# Altium PCB Acoustic_Cam.PcbDoc
Units mil, origin at the board's own origin, x right, y up, seen from the top; angles counter-clockwise.
Board outline 4410 x 4970 mil, 2 copper layers (Top Layer, Bottom Layer); 21 components, 26 nets, 120 pads, 43 vias.
Unrouted connection lines stored in the file: 5.
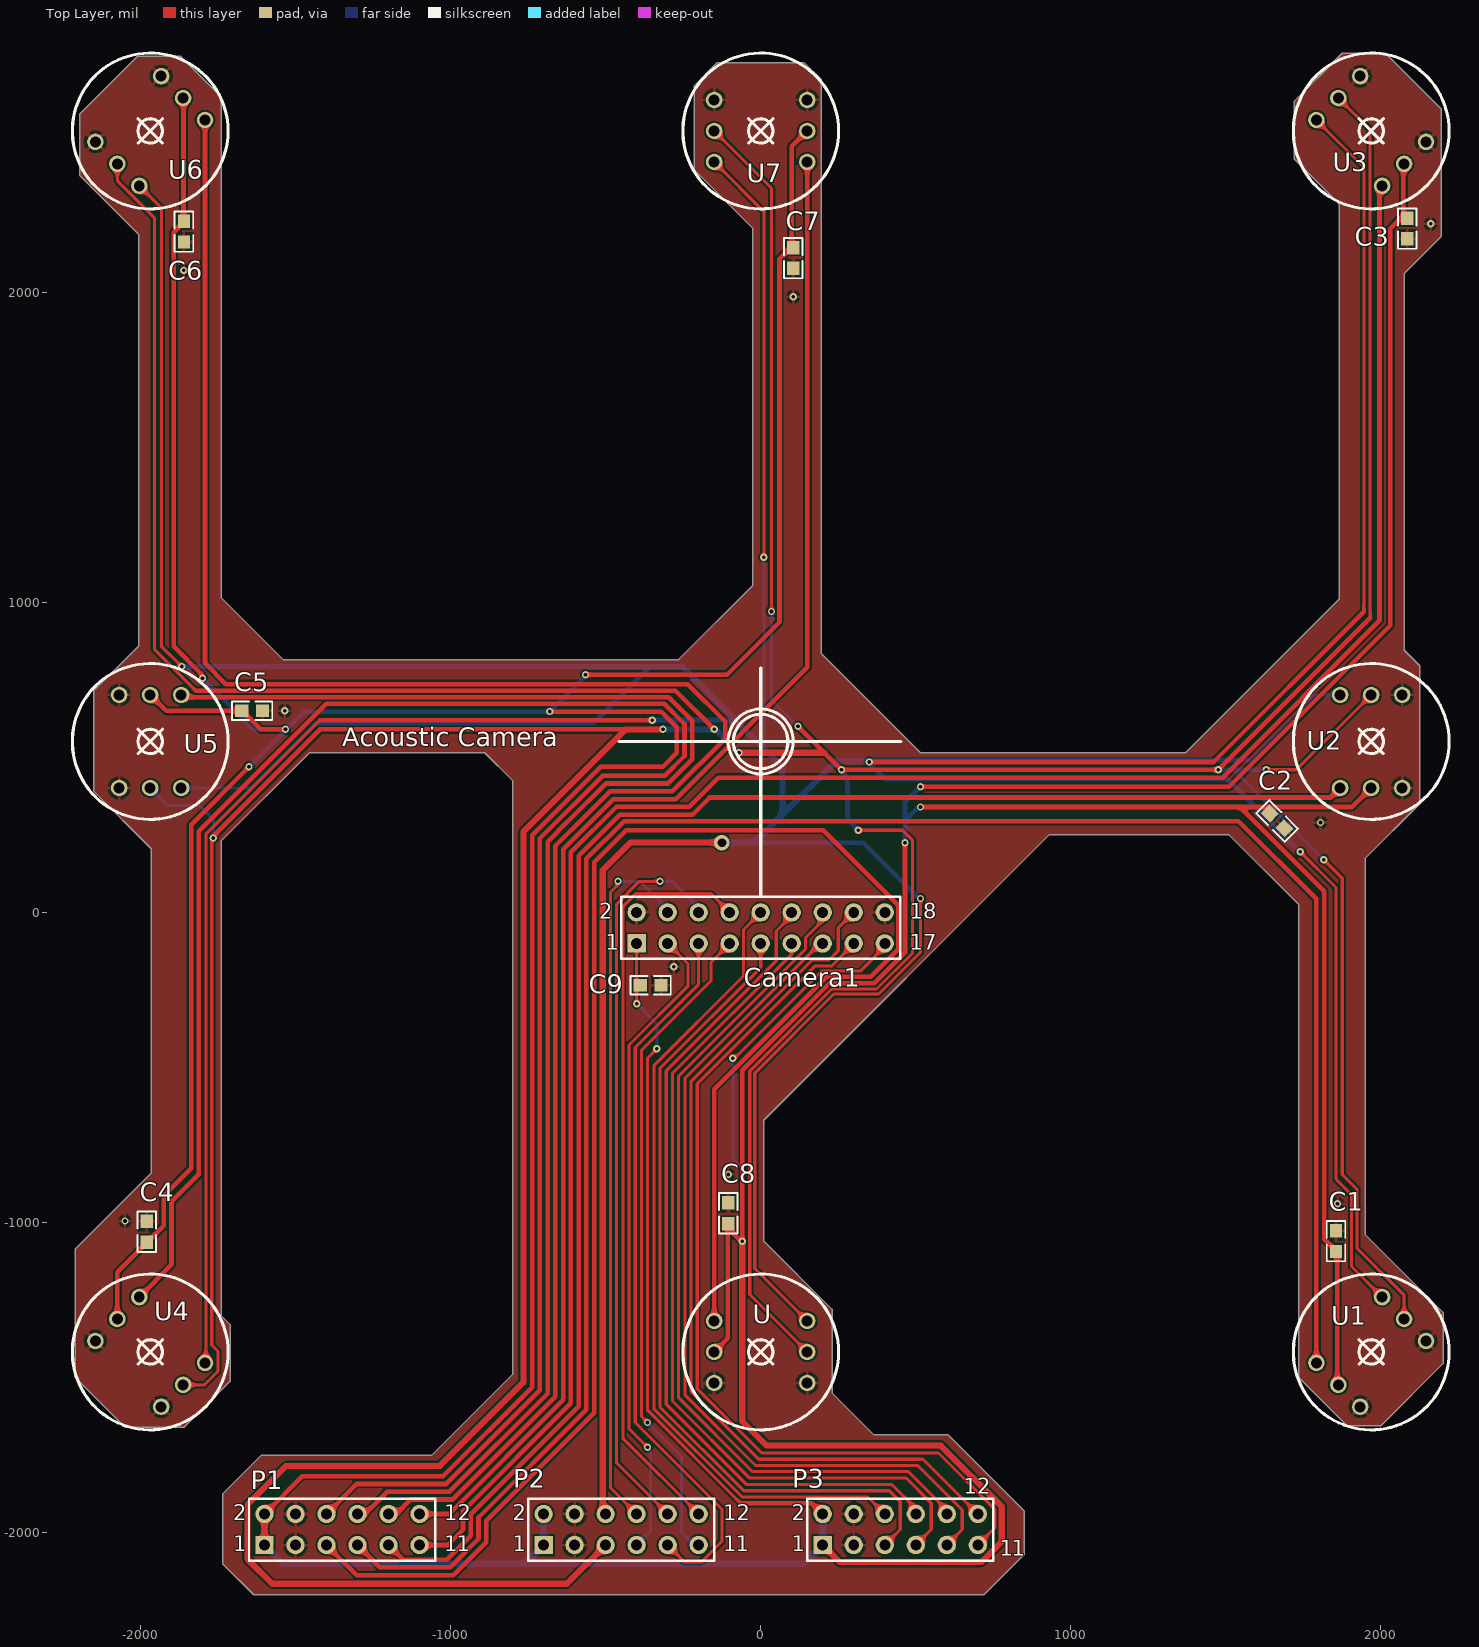
[diagram p0: Top Layer view]
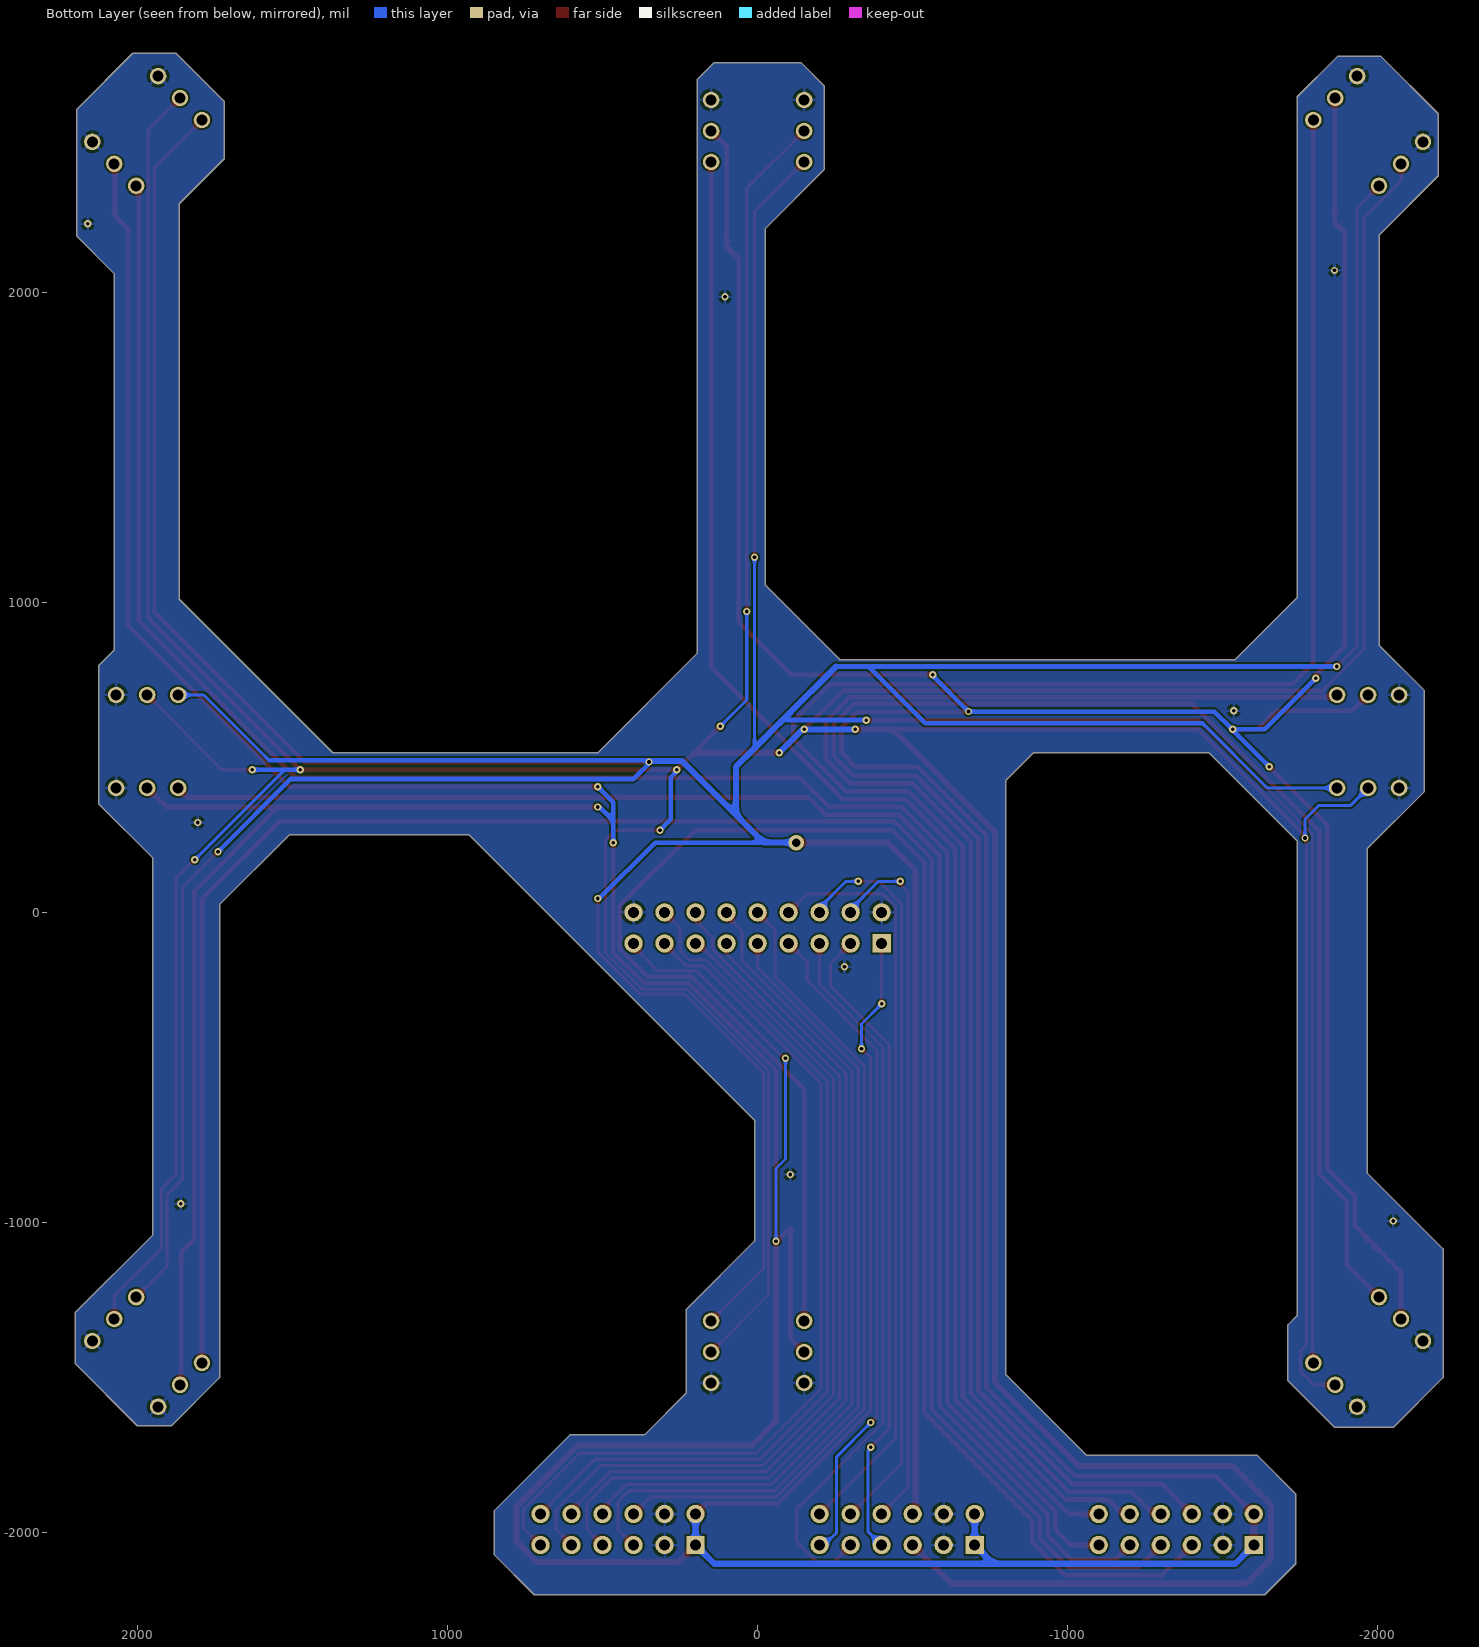
[diagram p1: Bottom Layer view, seen from below]

## Layer stack, top to bottom
Top Solder: solder mask 0.4, Solder Resist, Dk 3.5
Top Layer: signal copper 1.4
Dielectric 1: dielectric 12.6, FR-4, Dk 4.8
Bottom Layer: signal copper 1.4
Bottom Solder: solder mask 0.4, Solder Resist, Dk 3.5

## Board outline
-2050,-1660 -2210,-1500 -2210,-1085 -1965,-840 -1965,205 -2150,390 -2150,715 -2005,860 -2005,2185 -2195,2375 -2195,2575 -2010,2760 -1870,2760 -1740,2630 -1740,1015 -1540,815 -265,815 -25,1055 -25,2205 -215,2395 -215,2665 -140,2740 140,2740 195,2685 195,835 515,515 1370,515 1865,1010 1865,2285 1720,2430 1720,2615 1875,2770 2015,2770 2195,2590 2195,2180 2075,2060 2075,845 2125,795 2125,350 1950,175 1950,-1040 2200,-1290 2200,-1455 2000,-1655 1890,-1655 1735,-1500 1735,25 1510,250 930,250 10,-670 10,-1060 230,-1280 230,-1550 365,-1685 605,-1685 850,-1930 850,-2070 720,-2200 -1635,-2200 -1735,-2100 -1735,-1875 -1610,-1750 -1060,-1750 -800,-1490 -800,425 -890,515 -1455,515 -1740,230 -1740,-1300 -1710,-1330 -1710,-1510 -1860,-1660

## Design rules (kind name [scope] priority, off if disabled: settings)
Clearance [All] p1: gap=6 ignorepadtopadclearanceinfootprint=FALSE
PolygonConnect [All] p1: connectstyle=Relief reliefconductorwidth=10 reliefentries=4 polygonreliefangle="90 Angle" airgapwidth=10
RoutingVias [All] p1: holewidth=28 width=50 viastyle="Through Hole" minholewidth=11.81 minwidth=23.62 maxholewidth=28 maxwidth=50
SilkToSilkClearance [All] p1: silktosilkclearance=6
SilkToSolderMaskClearance [IsPad] p1: minsilkscreentomaskgap=6 clearancetoexposedcopper=TRUE
SolderMaskExpansion [All] p1: expansion=4
Width [All] p1: maxlimit=50 minlimit=6 preferedwidth=10
28 further rules are at their usual default settings.

## Classes and differential pairs
component class Sheet1: C1 C2 C3 C4 C5 C6 C7 C8 C9 Camera1 P1 P2 P3 U U1 U2 U4 U6 U7

## Components (designator, comment, footprint, x,y, rotation, side; value= is the part's Value field where it differs from the comment)
C1 "0.1uF" 0603-1 1855,-1060 r90 top
C2 "0.1uF" 0603-1 1665,295 r315 top
C3 "0.1uF" 0603-1 2085,2205 r270 top
C4 "0.1uF" 0603-1 -1980,-1030 r90 top
C5 "0.1uF" 0603-1 -1640,650 r0 top
C6 "0.1uF" 0603-1 -1860,2195 r270 top
C7 "0.1uF" 0603-1 105,2110 r270 top
C8 "0.1uF" 0603-1 -105,-970 r90 top
C9 "0.1uF" 0603-1 -355,-235 r0 top
Camera1 "OV7670" HDR2X9 -400,-100 r0 top
P1 "JE" HDR2X6 -1600,-2040 r0 top
P2 "JD" HDR2X6 -700,-2040 r0 top
P3 "JC" HDR2X6 200,-2040 r0 top
U "INMP441" INMP441board 0,-1417.32 r270 top
U1 "INMP441" INMP441board 1968.5,-1417.32 r315 top
U2 "INMP441" INMP441board 1968.5,551.18 r0 top
U3 "INMP441" INMP441board 1968.5,2519.68 r45 top
U4 "INMP441" INMP441board -1968.5,-1417.32 r225 top
U5 "INMP441" INMP441board -1968.5,551.18 r180 top
U6 "INMP441" INMP441board -1968.5,2519.68 r135 top
U7 "INMP441" INMP441board 0,2519.68 r90 top

## Footprints (in the part's own frame and the unit in brackets; to place one, negate y for a bottom-side part, rotate by r counter-clockwise, add the part's x,y. Pads: shape width x height; smd on the part's side, far side on the other; paste and mask are expansions set on the pad)
0603-1 [mm] "0603带丝印"
  rect 1.1x1 smd: 1(-0.85,0) 2(0.85,0)
  silkscreen extent -1.65,-0.76 1.65,0.76, body extent -0.8,-0.4 0.8,0.4, height 0.3
HDR2X6 [mm] "Connector; Header; 6x2 Position"
  rect 1.5x1.5 hole 0.9: 1(0,0)
  round 1.5 hole 0.9: 2(0,2.54) 3(2.54,0) 4(2.54,2.54) 5(5.08,0) 6(5.08,2.54) 7(7.62,0) 8(7.62,2.54) 9(10.16,0) 10(10.16,2.54) 11(12.7,0) 12(12.7,2.54)
  silkscreen extent -1.27,-1.27 13.97,3.81
HDR2X9 [mm] "Connector; Header; 9x2 Position"
  rect 1.5x1.5 hole 0.9: 1(0,0)
  round 1.5 hole 0.9: 2(0,2.54) 3(2.54,0) 4(2.54,2.54) 5(5.08,0) 6(5.08,2.54) 7(7.62,0) 8(7.62,2.54) 9(10.16,0) 10(10.16,2.54) 11(12.7,0) 12(12.7,2.54) 13(15.24,0) 14(15.24,2.54) 15(17.78,0) 16(17.78,2.54) 17(20.32,0) 18(20.32,2.54)
  silkscreen extent -1.27,-1.27 21.59,3.81
INMP441board [mm]
  round 1.35 hole 0.9: 1(-2.54,-3.81) 2(0,-3.81) 3(2.54,-3.81) 4(2.54,3.81) 5(0,3.81) 6(-2.54,3.81)
  silkscreen extent -6.38,-6.38 6.38,6.38

## Part data
C1 C2 C3 C4 C5 C6 C7 C8 C9: library part Cap, "Capacitor", LatestRevisionDate=17-Jul-2002, LatestRevisionNote="Re-released for DXP Platform.", PackageReference=RAD-0.3, Published=8-Jun-2000, Publisher="Altium Limited"
Camera1: library part "Header 9X2", "Header, 9-Pin, Dual row", LatestRevisionDate=17-Jul-2002, LatestRevisionNote="Re-released for DXP Platform.", Publisher="Altium Limited"
P1 P2 P3: library part "Header 6X2", "Header, 6-Pin, Dual row", LatestRevisionDate=17-Jul-2002, LatestRevisionNote="Re-released for DXP Platform.", Publisher="Altium Limited"

## Via types
v1: diameter 23.62, hole 11.81, Top Layer to Bottom Layer, 42 vias
v2: diameter 50, hole 28, Top Layer to Bottom Layer, 1 vias

## Nets (pads, with @x,y where several pads share a name; then routed paths per layer and width w, separated by ;. In a path a pad name is that pad's centre, name@x,y a point inside that pad or via, vN(x,y) a via of type N, cw(c..) or ccw(c..) an arc to the next point about the centre after c; other vN are vias at no path point)
+3.3: C1.1 C2.1 C3.1 C4.1 C5.1 C6.1 C7.1 C8.1 C9.1 Camera1.1 Camera1.17 P1.1 P1.2 P2.1 P2.2 P3.1 P3.2 U1.2 U2.2 U3.2 U4.2 U5.2 U6.2 U7.2 U.2 | length 29180
  Top Layer w10: v1(-400,-295) Camera1.1 ; v1(-335,-440) -364.53,-469.53 -364.53,-1605.47 -65,-1905 ; v1(-90,-470) -84.62,-470 196.1,-189.28 320.5,-189.28 400,-109.78 Camera1.17
  Top Layer w15: U4.2 -2074.57,-1160 -1925,-1010.43 -1925,-913.27 -1836.73,-825 -1836.73,283.27 v1(-1650,470) ; U5.2 -1917.32,650 C5.1 -1671.5,650 -1611.5,590 v1(-1532.5,590) ; U6.2 -1861.22,2624.53 -1861.22,2229.68 C6.1 -1860,2226.5 -1893.19,2193.31 -1893.19,858.19 -1800,765 v1(-1800,755) ; P1.2 -1477.97,-1817.97 -1024.39,-1817.97 -737.03,-1530.61 -737.03,207.26 -737.03,248.68 -515.71,470 -315,470 -270.69,514.31 -270.69,597.14 -321.05,647.5 v1(-680,647.5) ; v1(-565,766.25) -108.75,766.25 60.59,935.59 60.59,2107.08 95,2141.5 C7.1@95,2143.46 ; U.2 -105.93,-1373.25 -105.93,-1017.54 -63.46,-1060 v1(-59.23,-1060) -59.23,-509.71 221.7,-228.78 365.91,-228.78 465,-129.7 v1(465,225) ; -65,-1905 165,-1905 P3.2 ; C7.1@100,2143.46 100,2469.68 U7.2 ; v1(515,340) 1545,340 ; v1(515,405) 1510,405 2030,925 2030,2205 2072.28,2247.28 2072.28,2411.33 U3.2 ; C2.1@1635,340 1545,340 ; C2.1@1640,335 1645,340 1907.32,340 U2.2 ; U1.2 1858.72,-1519.67 1858.72,-1097.18 C1.1 1855,-1091.5 1829.19,-1065.69 1828.07,-1065.69 1816.73,-1054.35 1816.73,68.27 1545,340
  Top Layer w20: P1.1 P1.2 ; v1(-59.23,-1060) -59.23,-1640.77 19.09,-1719.09 580.91,-1719.09 777.5,-1915.68 777.5,-2029.01 711.51,-2095 255,-2095 P3.1
  Bottom Layer w10: v1(-400,-295) -335,-360 v1(-335,-440) ; v1(-90,-470) -90,-795 -59.23,-825.77 v1(-59.23,-1060)
  Bottom Layer w15: v1(-1800,755) -1635,590 v1(-1532.5,590) ; v1(-1650,470) -1532.5,587.5 v1(-1532.5,590) ; v1(-565,766.25) -565,762.5 v1(-680,647.5) -1472.5,647.5 -1530,590 v1(-1532.5,590) ; v1(465,225) 465,295 ; v1(515,340) 510,340 465,295 ; v1(515,405) 465,355 465,295
  Bottom Layer w20: P1.1 -1540,-2100 -860,-2100 -760,-2100 ; P2.2 P2.1 -760,-2100 ; P3.2 P3.1 140,-2100 -760,-2100
D0: Camera1.16 P3.12 | length 2882.2
  Top Layer w10: Camera1.16 250,-50 250,-123.28 220,-153.28 166.26,-153.28 -224.53,-544.07 -224.53,-1545.47 -6.64,-1763.36 523.36,-1763.36 P3.12
D1: Camera1.15 P3.11 | length 2934.6
  Top Layer w10: Camera1.15 300,-101.57 228.28,-173.28 174.46,-173.28 -204.53,-552.27 -204.53,-1535.47 3.36,-1743.36 573.36,-1743.36 755,-1925 755,-1985 P3.11
D2: Camera1.14 P3.10 | length 2785.3
  Top Layer w10: Camera1.14 200,-26.08 144.53,-81.56 144.53,-118.44 -264.53,-527.5 -264.53,-1565.47 -26.64,-1803.36 476.64,-1803.36 600,-1926.72 P3.10
D3: Camera1.13 P3.9 | length 2839.2
  Top Layer w10: Camera1.13 200,-91.26 -244.53,-535.78 -244.53,-1555.47 -16.64,-1783.36 506.33,-1783.36 650,-1927.03 650,-1990 P3.9
D4: Camera1.12 P3.8 | length 2715.1
  Top Layer w10: Camera1.12 100,-10 50,-60 50,-156.4 -304.53,-510.93 -304.53,-1585.47 -45,-1845 423.28,-1845 500,-1921.72 P3.8
D5: Camera1.11 P3.7 | length 2761.5
  Top Layer w10: Camera1.11 100,-134.69 -284.53,-519.21 -284.53,-1575.47 -36.64,-1823.36 468.36,-1823.36 550,-1905 550,-1990 P3.7
D6: Camera1.10 P3.6 | length 2628.3
  Top Layer w10: Camera1.10 -55.47,-55.47 -55.47,-205.31 -344.53,-494.36 -344.53,-1600.47 -60,-1885 345,-1885 P3.6
D7: Camera1.9 P3.5 | length 2691.3
  Top Layer w10: Camera1.9 0,-178.12 -324.53,-502.65 -324.53,-1595.47 -55,-1865 415,-1865 450,-1900 450,-1990 P3.5
GND: C1.2 C2.2 C3.2 C4.2 C5.2 C6.2 C7.2 C8.2 C9.2 Camera1.2 Camera1.18 P1.3 P1.4 P2.3 P2.4 P3.3 P3.4 U1.3 U1.4 U2.3 U2.4 U3.3 U3.4 U4.3 U4.4 U5.3 U5.4 U6.3 U6.4 U7.3 U7.4 U.3 U.4
  other v1: -2050,-995 1860,-940 -105,-845 -280,-175 1805,290 -1535,650 105,1985 -1860,2070 2160,2220
HREF: Camera1.6 P2.10 | length 2380
  Top Layer w10: v1(-325,100) -391.26,100 -464.53,26.73 -464.53,-1775.47 P2.10
  Bottom Layer w10: v1(-325,100) -285,100 -200,15 Camera1.6
PCLK: Camera1.7 P2.11 | length 2143.1
  Top Layer w10: v1(-365,-1645) -384.53,-1625.47 -384.53,-444.11 -160,-219.58 -160,-160 Camera1.7
  Bottom Layer w10: v1(-365,-1645) -255,-1755 -255,-2000 -239.69,-2015.31 -237.97,-2015.31 -213.27,-2040 P2.11
RECDAT0: P1.5 U.1 | length 5932.2
  Top Layer w15: P1.5 -1302.97,-2137.03 -991.32,-2137.03 -885,-2030.71 -885,-1961.42 -537.03,-1613.45 ; -537.03,-1410.75 -537.03,-1613.45 ; U.1 -150,-570.78 213,-207.78 354.61,-207.78 444,-118.4 444,22.51 201.15,265.36 -433.93,265.36 -537.03,162.26 -537.03,-1613.45
RECDAT1: P1.7 U1.1 | length 6981
  Top Layer w15: P1.7 -1227.97,-2112.03 -1001.67,-2112.03 -910,-2020.36 -910,-1951.07 -562.03,-1603.09 ; -562.03,-1421.11 -562.03,-1603.09 ; U1.1 1791.73,43.27 1540.64,294.36 -440.29,294.36 -562.03,172.62 -562.03,-1603.09
RECDAT2: P1.9 U2.1 | length 5360.7
  Top Layer w15: P1.9 -1152.97,-2087.03 -1012.03,-2087.03 -935,-2010 -935,-1940.71 -587.03,-1592.74 ; -587.03,-1431.46 -587.03,-1592.74 ; U2.1 1837.72,370.39 -164.96,370.39 -220,315.36 -454.64,315.36 -587.03,182.97 -587.03,-1592.74
RECDAT3: P1.11 U3.1 | length 6951.6
  Top Layer w15: P1.11 -1010,-2040 -960,-1990 -960,-1930.36 -612.03,-1582.38 ; -612.03,-1441.82 -612.03,-1582.38 ; U3.1 1995,2334.05 1995,940 1489.31,434.31 -136.4,434.31 -230.36,340.36 -465,340.36 -612.03,193.33 -612.03,-1582.38
RECDAT4: P1.6 U4.1 | length 6657.4
  Top Layer w15: U4.1 -1900,-1136.69 -1900,-933.27 -1811.73,-845 -1811.73,261.56 -1400.47,672.81 -311,672.81 -245.69,607.5 -245.69,504.31 -309.64,440.36 -510,440.36 -712.03,238.33 -712.03,-1540.96 -1014.04,-1842.97 -1302.97,-1842.97 P1.6
RECDAT5: P1.8 U5.1 | length 4932.9
  Top Layer w15: U5.1 -1861.13,693.81 -296.65,693.81 -220.69,617.85 -220.69,494.31 -299.64,415.36 -499.64,415.36 -615,300 ; P1.8 -1286.91,-1940 -1281.91,-1945 -1204.88,-1867.97 -1003.68,-1867.97 -687.03,-1551.32 -687.03,227.97 -620,295
RECDAT6: P1.10 U6.1 | length 6723.1
  Top Layer w15: U6.1 -1791.73,802.91 -1724.63,735.81 -235.02,735.81 -114.69,615.48 -114.69,560.31 -284.64,390.36 -485.71,390.36 -563.03,313.03 -662.03,214.04 -662.03,-1561.67 -993.33,-1892.97 -1128.58,-1892.97 -1175.61,-1940 P1.10
RECDAT7: P1.12 U7.1 | length 5050.7
  Top Layer w15: P1.12 -1005,-1940 -637.03,-1572.03 -637.03,203.68 -475.36,365.36 -274.64,365.36 150,790 U7.1
SCK: P2.6 U1.6 U2.6 U3.6 U4.6 U5.6 U6.6 U7.6 U.6 | length 24590.1
  Top Layer w10: U6.6 -1932.5,2271.55 -1932.5,858.12 v1(-1867.19,792.81) ; U4.6 -1789.23,-1450.18 -1789.23,252.24 -1421.46,620 ; U7.6 10,2259.69 v1(10,1145) ; U.6 -19.25,-1148.07 -19.25,-518.52 235.99,-263.28 380.2,-263.28 515,-128.49 v1(515,45) ; v1(1740,195) 1855,80 1855,-860 1905,-910 1905,-1141.69 U1.6 ; U3.6 1945,2401.77 1945,970
  Top Layer w15: -1421.46,620 v1(-350,620) ; v1(350,485) 1460,485 1945,970
  Top Layer w20: P2.6 -509.53,-1930.47 -509.53,135.47 -420,225 v2(-125,225)
  Bottom Layer w10: U5.6 -1643.82,401.18 -1435,610 ; -87.81,627.81 -80,627.81 ; 10,530 v1(10,1145) ; v1@340,490 v1@342.19,487.81 ; v1@510,45 v1(515,45) ; 1575,490 1786.18,701.18 U2.6
  Bottom Layer w15: v1(-1867.19,792.81) -252.81,792.81 ; -1435,610 -540,610 -360,790 ; v1(-350,620) -349.69,620.31 -95.31,620.31 -87.81,627.81 ; -20,225 330,225 v1@510,45 ; v1@340,490 1575,490 ; v1@342.19,487.81 399.69,430.31 1504.69,430.31 v1(1740,195)
  Bottom Layer w20: -252.81,792.81 -87.81,627.81 10,530 70,470 70,315 ; v2(-125,225) -20,225 70,315 ; v1(350,485) 347.19,487.81 342.19,487.81 242.81,487.81 70,315
SDA: Camera1.4 P2.8 | length 2292.5
  Top Layer w10: v1(-460,100) -460,90 -484.53,65.47 -484.53,-1855.47 P2.8
  Bottom Layer w10: v1(-460,100) -390,100 -300,10 Camera1.4
SDL: Camera1.3 P2.7 | length 2092.5
  Top Layer w10: v1(-365,-1725) -424.53,-1665.47 -424.53,-427.54 -235,-238.02 -235,-165 Camera1.3
  Bottom Layer w10: P2.7 -355.47,-1995.47 -355.47,-1738.21 -365,-1728.69 v1(-365,-1725)
VSY: Camera1.5 P2.9 | length 2354
  Top Layer w10: P2.9 -245,-2095 -192.03,-2095 -125,-2027.97 -125,-1924.6 -404.53,-1645.07 -404.53,-435.83 -200,-231.3 Camera1.5
WS: P2.5 U1.5 U2.5 U3.5 U4.5 U5.5 U6.5 U7.5 U.5 | length 23427.6
  Top Layer w10: U6.5 -2074.57,2359.57 -1955,2240 -1955,848.36 -1821.64,715 ; U4.5 -1793.39,-1523.39 -1750,-1480 -1750,-1415 -1770,-1395 v1@-1770,240 ; U7.5 35,2334.69 v1(35,970) ; U.5 -35.25,-1232.07 -35.25,-511.89 229.36,-247.28 373.58,-247.28 490,-130.86 490,232.26 457.26,265 v1(315,265) ; v1(1630,460) 1727.32,460 U2.5 ; v1(1815,170) 1875,110 1875,-845 1922.5,-892.5 1922.5,-1082.5 2074.57,-1234.57 U1.5 ; U3.5 1965,2523.19 1965,2325 1965,2290.63 1965,1284 1965,950
  Top Layer w15: -1821.64,715 -1733.52,715 -1733.33,714.81 -274.81,714.81 v1(-150,590) ; v1@-1770,240 -1420,590 -435,590 ; v1(120,600) 205,515 v1(260.31,459.69) 1474.69,459.69 v1(1475,460) 1965,950
  Top Layer w20: P2.5 -625,-2165 -1575,-2165 -1655,-2085 -1655,-1910 -1530,-1785 -1035,-1785 -765,-1515 -765,260 -440,585 ; -435,590 v1(-315,590) ; v1(-70,515) 205,515
  Bottom Layer w10: U5.5 -1912.32,345 -1810,345 -1765,300 v1(-1765,240) ; v1(35,970) 35,685 v1(120,600) ; v1@260.31,454.69 v1(260.31,459.69) ; 1525,460 v1(1815,170)
  Bottom Layer w15: v1@260.31,454.69 280,435 280,300 v1(315,265) ; v1(1475,460) 1525,460 v1(1630,460)
  Bottom Layer w20: v1(-315,590) v1(-150,590) -145,590 v1(-70,515)
XCLK: Camera1.8 P2.12 | length 2501.3
  Top Layer w10: -444.53,-1640.47 -444.53,-1695.47 ; P2.12 -444.53,-1695.47 ; Camera1.8 -160,60 -402.97,60 -444.53,18.44 -444.53,-1695.47

## Polygon pours and split planes (outlines as drawn)
GND on Top Layer "Top Layer-No Net" (solid, remove dead copper, pour order 11): -2050,-1660 -2210,-1500 -2210,-1085 -1965,-840 -1965,205 -2150,390 -2150,715 -2005,860 -2005,2185 -2195,2375 -2195,2575 -2010,2760 -1870,2760 -1740,2630 -1740,1015 -1540,815 -265,815 -25,1055 -25,2205 -215,2395 -215,2665 -140,2740 140,2740 195,2685 195,835 515,515 1370,515 1865,1010 1865,2285 1720,2430 1720,2615 1875,2770 2015,2770 2195,2590 2195,2180 2075,2060 2075,845 2125,795 2125,350 1950,175 1950,-1040 2200,-1290 2200,-1455 2000,-1655 1890,-1655 1735,-1500 1735,25 1510,250 930,250 10,-670 10,-1060 230,-1280 230,-1550 365,-1685 605,-1685 850,-1930 850,-2070 720,-2200 -1635,-2200 -1735,-2100 -1735,-1875 -1610,-1750 -1060,-1750 -800,-1490 -800,425 -890,515 -1455,515 -1740,230 -1740,-1300 -1710,-1330 -1710,-1510 -1860,-1660
GND on Bottom Layer "Top Layer-No Net1" (solid, remove dead copper, pour order 12): -2050,-1660 -2210,-1500 -2210,-1085 -1965,-840 -1965,205 -2150,390 -2150,715 -2005,860 -2005,2185 -2195,2375 -2195,2575 -2010,2760 -1870,2760 -1740,2630 -1740,1015 -1540,815 -265,815 -25,1055 -25,2205 -215,2395 -215,2665 -140,2740 140,2740 195,2685 195,835 515,515 1370,515 1865,1010 1865,2285 1720,2430 1720,2615 1875,2770 2015,2770 2195,2590 2195,2180 2075,2060 2075,845 2125,795 2125,350 1950,175 1950,-1040 2200,-1290 2200,-1455 2000,-1655 1890,-1655 1735,-1500 1735,25 1510,250 930,250 10,-670 10,-1060 230,-1280 230,-1550 365,-1685 605,-1685 850,-1930 850,-2070 720,-2200 -1635,-2200 -1735,-2100 -1735,-1875 -1610,-1750 -1060,-1750 -800,-1490 -800,425 -890,515 -1455,515 -1740,230 -1740,-1300 -1710,-1330 -1710,-1510 -1860,-1660

## Silkscreen, mask and mechanical layers (free items; w line width, h text height)
Top Overlay:
  circle w10: c0,551.18 r87.8
  circle w10: c0,551.18 r105.01
  circle w10: c-1968.5,2519.68 r39.37
  circle w10: c-1968.5,-1417.32 r39.37
  circle w10: c-1968.5,551.18 r39.37
  circle w10: c1968.5,-1417.32 r39.37
  circle w10: c1968.5,2519.68 r39.37
  circle w10: c1968.5,551.18 r39.37
  circle w10: c0,-1417.32 r39.37
  circle w10: c0,2519.69 r39.37
  lines w10: -2007.87,-1456.69 -1929.13,-1377.95 ; -2007.87,-1377.95 -1929.13,-1456.69 ; -2007.87,511.81 -1929.13,590.55 ; -2007.87,2480.31 -1929.13,2559.06 ; -2007.87,2559.06 -1929.13,2480.31 ; -1929.13,511.81 -2007.87,590.55 ; -456.18,551.18 0,551.18 ; -39.37,-1456.69 39.37,-1377.95 ; -39.37,2480.31 39.37,2559.06 ; 0,55 0,551.18 ; 0,787.4 0,551.18 ; 39.37,-1456.69 -39.37,-1377.95 ; 39.37,2480.31 -39.37,2559.06 ; 452.76,551.18 0,551.18 ; 1929.13,-1456.69 2007.87,-1377.95 ; 1929.13,-1377.95 2007.87,-1456.69 ; 1929.13,511.81 2007.87,590.55 ; 1929.13,2480.31 2007.87,2559.06 ; 1929.13,2559.06 2007.87,2480.31 ; -2007.87,590.55 -2007.87,590.55 ; -1929.13,590.55 -1929.13,590.55 ; -39.37,-1377.95 -39.37,-1377.95 ; -39.37,2559.06 -39.37,2559.06 ; 39.37,-1377.95 39.37,-1377.95 ; 39.37,2559.06 39.37,2559.06 ; 1929.13,590.55 2007.87,511.81 ; 1929.13,590.55 1929.13,590.55 ; 2007.87,511.81 2007.87,511.81 ; 2007.87,590.55 2007.87,590.55
  text "Acoustic Camera" at -1350,535 h60
Drill Drawing:
  lines w10: -2210,-1500 -2210,-1085 -1965,-840 -1965,205 -2150,390 -2150,715 -2005,860 -2005,2185 -2195,2375 -2195,2575 -2010,2760 -1870,2760 -1740,2630 -1740,1015 -1540,815 -265,815 -25,1055 -25,2205 -215,2395 -215,2665 -140,2740 140,2740 195,2685 195,835 515,515 1370,515 1865,1010 1865,2285 1720,2430 1720,2615 1875,2770 2015,2770 2195,2590 2195,2180 2075,2060 2075,845 2125,795 2125,778.75 2125,350 1950,175 1950,-1040 2200,-1290 2200,-1455 2000,-1655 1890,-1655 1735,-1500 1735,25 1510,250 930,250 10,-670 10,-1060 230,-1280 230,-1550 365,-1685 605,-1685 850,-1930 850,-2070 720,-2200 -1635,-2200 -1735,-2100 -1735,-1875 -1610,-1750 -1060,-1750 -800,-1490 -800,425 -890,515 -1455,515 -1740,230 -1740,-212.5 -1740,-1300 -1710,-1330 -1710,-1510 -1860,-1660 -2050,-1660 -2210,-1500

## Text inside footprints (layer, text, board x,y; h text height)
Camera1: Top Overlay "18" at 480,-20 h50; Top Overlay "17" at 480,-120 h50; Top Overlay "1" at -500,-120 h50; Top Overlay "2" at -520,-20 h50
P1: Top Overlay "12" at -1020,-1960 h50; Top Overlay "1" at -980,-2060 h50; Top Overlay "1" at -1020,-2060 h50; Top Overlay "1" at -1700,-2060 h50; Top Overlay "2" at -1700,-1960 h50
P2: Top Overlay "12" at -120,-1960 h50; Top Overlay "1" at -80,-2060 h50; Top Overlay "1" at -120,-2060 h50; Top Overlay "1" at -800,-2060 h50; Top Overlay "2" at -800,-1960 h50
P3: Top Overlay "12" at 655,-1875 h50; Top Overlay "1" at 810,-2075 h50; Top Overlay "1" at 770,-2075 h50; Top Overlay "1" at 100,-2060 h50; Top Overlay "2" at 100,-1960 h50